# Altium PCB mbed_to_ccs.PcbDoc
Units mil, origin at the board's own origin, x right, y up, seen from the top; angles counter-clockwise.
Board outline 2290 x 2080 mil, 2 copper layers (Top Layer, Bottom Layer); 10 components, 14 nets, 86 pads, 5 vias.
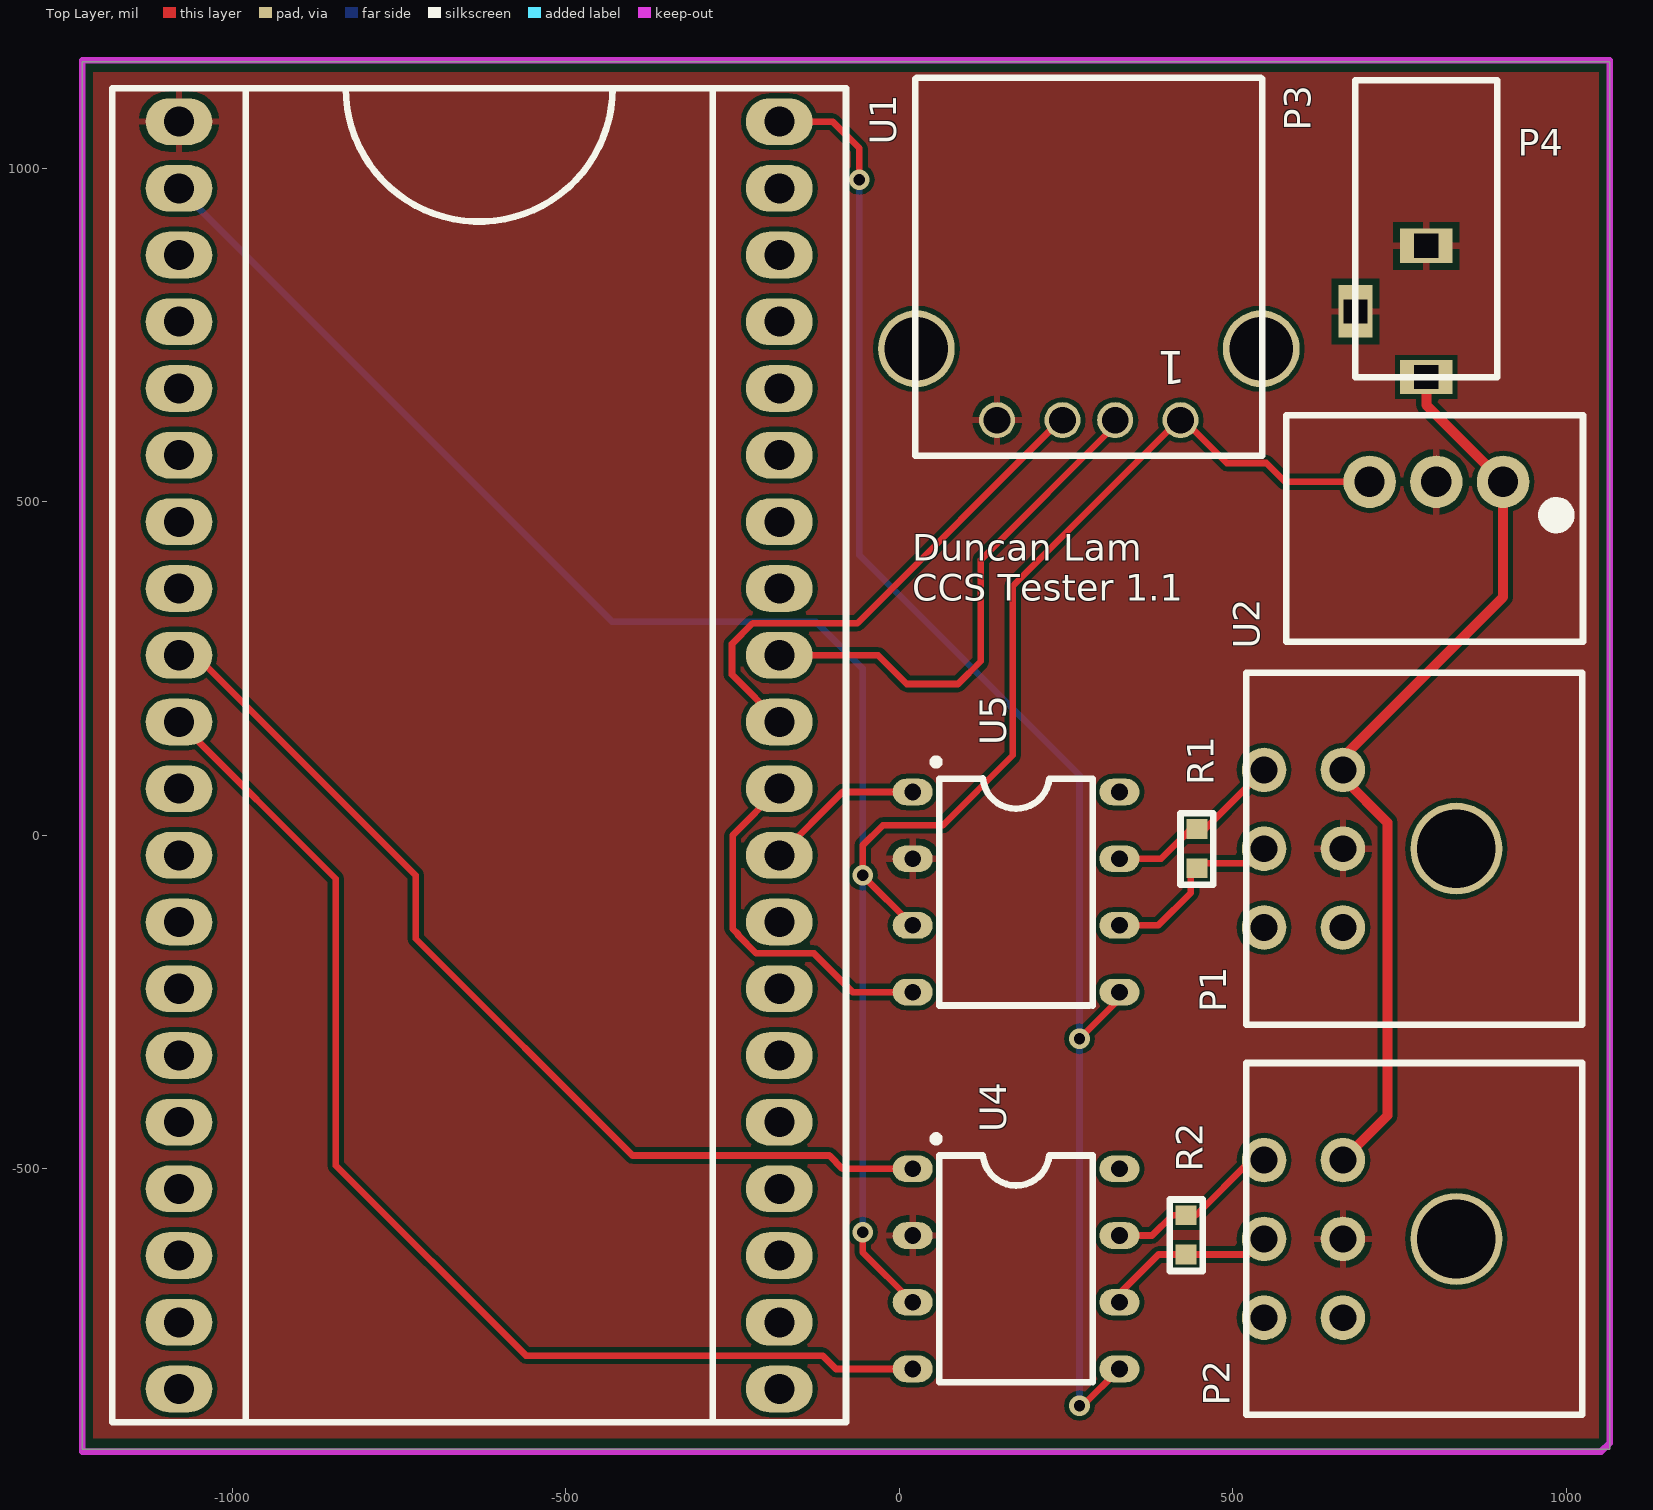
[diagram p0: Top Layer view]
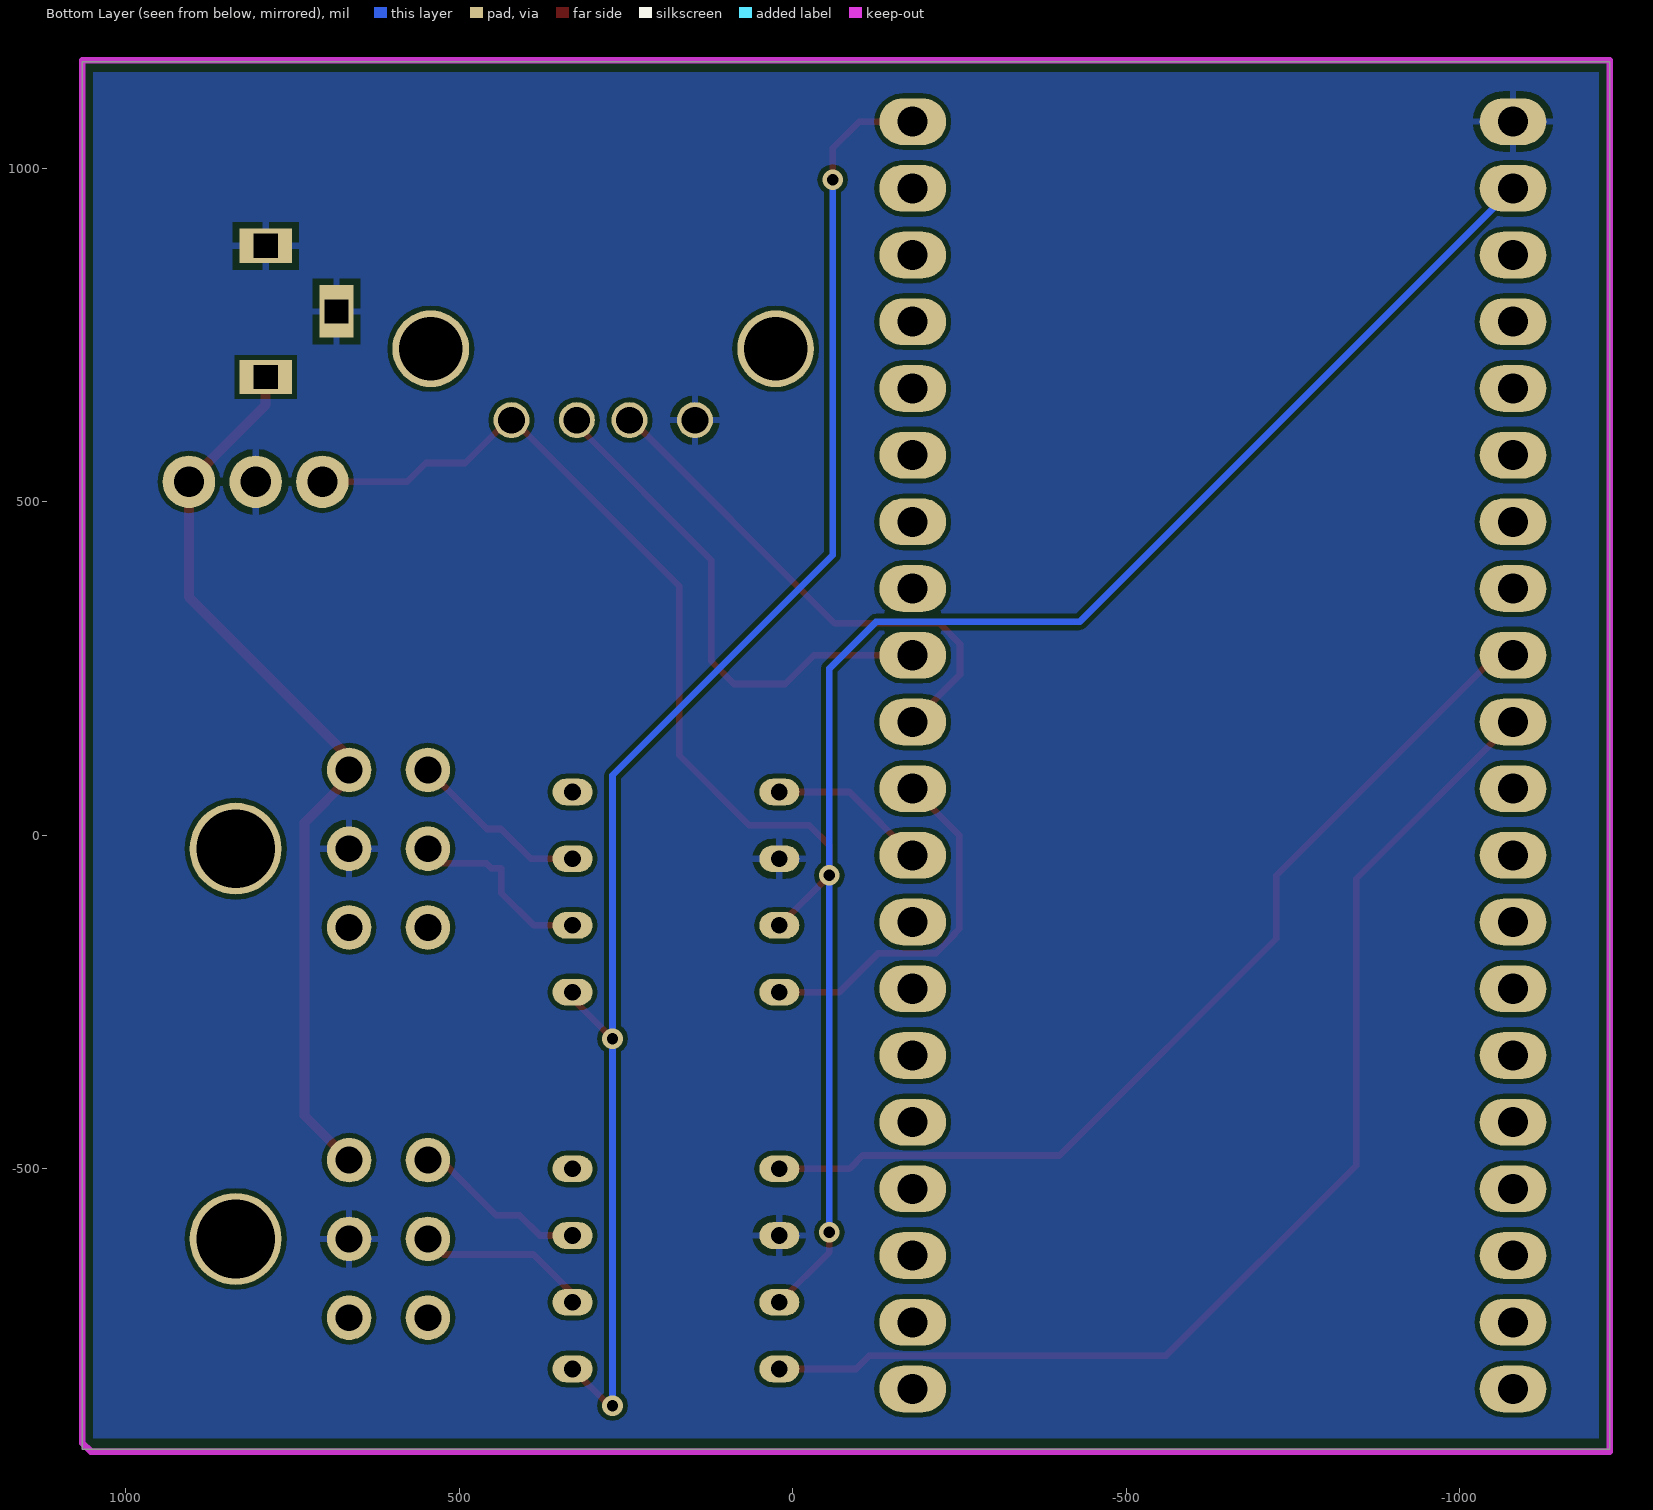
[diagram p1: Bottom Layer view, seen from below]

## Layer stack, top to bottom
Top Solder: solder mask 0.4, Solder Resist, Dk 3.5
Top Layer: signal copper 1.4
Dielectric 1: dielectric 12.6, FR-4, Dk 4.8
Bottom Layer: signal copper 1.4
Bottom Solder: solder mask 0.4, Solder Resist, Dk 3.5

## Board outline
-1225,1160 1065,1160 1065,-920 -1225,-920

## Design rules (kind name [scope] priority, off if disabled: settings)
BoardOutlineClearance [All] p1: gap=16
Clearance [All] p1: gap=7
DiffPairsRouting [All] p1: maxlimit=10 minlimit=10 mostfreqgap=10 toplayer_minwidth=7 toplayer_maxwidth=15 toplayer_prefwidth=10 bottomlayer_minwidth=7 bottomlayer_maxwidth=15 bottomlayer_prefwidth=10 maxuncoupledlength=500
HoleSize [All] p1: absolutevalues=TRUE maxlimit=28 minlimit=13 maxpercent=80.000 minpercent=20.000
MinimumAnnularRing [All] p1: minimumring=7
PolygonConnect [All] p1: connectstyle=Relief reliefconductorwidth=10 reliefentries=4 polygonreliefangle="90 Angle" airgapwidth=10
RoutingVias [All] p1: holewidth=14 width=27 viastyle="Through Hole" minholewidth=14 minwidth=28 maxholewidth=14 maxwidth=28
SolderMaskExpansion [All] p1: expansion=4
Width Width_1 [All] p1: maxlimit=15 minlimit=7 preferedwidth=10
Width 12V [InNet('12V')] p2: maxlimit=25 minlimit=15 preferedwidth=20
28 further rules are at their usual default settings.

## Classes and differential pairs
differential pair CAN1: +CAN1_P -CAN1_N
differential pair CAN2: +CAN2_P -CAN2_N
differential pair USB: +USB_P -USB_N

## Components (designator, comment, footprint, x,y, rotation, side; value= is the part's Value field where it differs from the comment)
P1 "CCS" PCB_MLX_MICROFIT_3X2 835,-20 r90 top
P2 "CCS" PCB_MLX_MICROFIT_3X2 835,-605 r90 top
P3 "USB-A" "USB-A UE27AC54100 Receptacle" 284,676 r180 top
P4 "PJ-007" "BARREL JACK PJ007" 790,687 r270 top
R1 "120" PCB_GENERIC_SMD_0603 446,-20 r270 top
R2 "120" PCB_GENERIC_SMD_0603 430,-599 r270 top
U1 "LPC1768 mbed" "LPC 1768 mbed Layout" -630,120 r0 top
U2 "R78E-1.0 DC/DC" R78-1.0 805,530 r180 top
U4 "MCP2562" MCP2562 175,-650 r0 top
U5 "MCP2562" MCP2562 175,-85 r0 top

## Footprints (in the part's own frame and the unit in brackets; to place one, negate y for a bottom-side part, rotate by r counter-clockwise, add the part's x,y. Pads: shape width x height; smd on the part's side, far side on the other; paste and mask are expansions set on the pad)
"BARREL JACK PJ007" [mm] "Pin connections for Barrel Jack"
  rect 1.3x2 hole 0.9 square: 1(0,0) 2(-5,0)
  rect 2x1.3 hole 0.9 square: 3(-2.5,-2.7)
  silkscreen extent -11.3,-2.7 0,2.7, body extent -11.31,-2.68 0.14,2.67, height 7.4
"LPC 1768 mbed Layout" [mil]
  oval 100x70 hole 45: 1(-450,950) 2(-450,850) 3(-450,750) 4(-450,650) 5(-450,550) 6(-450,450) 7(-450,350) 8(-450,250) 9(-450,150) 10(-450,50) 11(-450,-50) 12(-450,-150) 13(-450,-250) 14(-450,-350) 15(-450,-450) 16(-450,-550) 17(-450,-650) 18(-450,-750) 19(-450,-850) 20(-450,-950) 21(450,-950) 22(450,-850) 23(450,-750) 24(450,-650) 25(450,-550) 26(450,-450) 27(450,-350) 28(450,-250) 29(450,-150) 30(450,-50) 31(450,50) 32(450,150) 33(450,250) 34(450,350) 35(450,450) 36(450,550) 37(450,650) 38(450,750) 39(450,850) 40(450,950)
  silkscreen extent -550,-1000 550,1000, body extent -545,-990 545,1000, height 260
MCP2562 [mil]
  oval 60x40 hole 25: 1(-155,150) 2(-155,50) 3(-155,-50) 4(-155,-150) 5(155,-150) 6(155,-50) 7(155,50) 8(155,150)
  silkscreen extent -125,-170 115,200, body extent -115,-170 115,170, height 210
PCB_GENERIC_SMD_0603 [mm]
  rect 0.75x0.8 smd: 1(-0.75,0) 2(0.75,0)
  silkscreen extent -1.35,-0.63 1.38,0.63, body extent -0.75,-0.5 0.75,0.5, height 0.45
PCB_MLX_MICROFIT_3X2 [mm]
  round 1.7 hole 1.02: 1(3,4.32) 2(0,4.32) 3(-3,4.32) 4(3,7.32) 5(0,7.32) 6(-3,7.32)
  round 3.5 hole 3: ""(0,0)
  silkscreen extent -6.7,-4.8 6.7,8, body extent -6.57,-4.65 6.58,7.59, height 8.83
R78-1.0 [mm]
  round 2 hole 1.15: 1(-2.54,0) 2(0,0) 3(2.54,0)
  silkscreen extent -5.59,-2.54 5.71,6.1, body extent -4.44,-1.59 4.45,5.4, height 10.4
"USB-A UE27AC54100 Receptacle" [mil]
  round 54 hole 40: 1(-137.5,53.5) 2(-39.5,53.5) 3(39.5,53.5) 4(137.5,53.5)
  round 115 hole 95: NC(-258.5,-53.5) NC(258.5,-53.5)
  silkscreen extent -260,-460 260,107, body extent -272,-455 272,106, height 247

## Part data
P1 P2: library part SCH_MLX_MICROFIT_3X2
P3: library part "USB-A UE27AC54100 Receptacle"
P4: library part Component_1
R1 R2: library part SCH_GENERIC_RESISTOR_0603, "120 Ohms"
U2: library part R78E-1.0

## Via types
v1: diameter 31, hole 17, Top Layer to Bottom Layer, 5 vias

## Nets (pads, with @x,y where several pads share a name; then routed paths per layer and width w, separated by ;. In a path a pad name is that pad's centre, name@x,y a point inside that pad or via, vN(x,y) a via of type N, cw(c..) or ccw(c..) an arc to the next point about the centre after c; other vN are vias at no path point)
3.3V: U1.40 U4.5 U5.5 | length 2335.9
  Top Layer w10: U1.40 -100,1070 -60,1030 v1(-60,983) ; v1(270,-855) 275,-855 U4.5 ; v1(270,-305) 330,-245 U5.5
  Bottom Layer w10: v1(-60,983) -60,420 270,90 v1(270,-305) v1(270,-855)
5V: P3.1 U1.2 U2.3 U4.3 U5.3 | length 3669.8
  Top Layer w10: v1(-55,-595) -55,-625 U4.3 ; U5.3 v1(-55,-60) -55,-15 -25,15 65,15 170,120 170,374 422.5,626.5 490.91,558.09 549.97,558.09 578.06,530 U2.3
  Bottom Layer w10: U1.2 -430,320 -125,320 -55,250 v1(-55,-60) v1(-55,-595)
12V: P1.1 P2.1 P4.1 U2.1 | length 1376.5
  Top Layer w15: P2.1 732,-419.81 732,19 664.92,86.08 P1.1 664.92,116.92 905,357 U2.1 790,645 P4.1
CAN1_N: P1.5 R1.2 U5.6 | length 285.8
  Top Layer w10: U5.6 388,-135 437,-86 437,-49.53 451.47,-49.53 459,-42 524.81,-42 P1.5
CAN1_P: P1.4 R1.1 U5.7 | length 286.1
  Top Layer w10: U5.7 392.47,-35 437,9.53 458.23,9.53 P1.4
  Top Layer w15: U5.7 U5.7@340,-45
CAN2_N: P2.5 R2.2 U4.6 | length 263.8
  Top Layer w10: U4.6 330,-687 388.47,-628.53 R2.2 523.28,-628.53 P2.5
CAN2_P: P2.4 R2.1 U4.7 | length 263.7
  Top Layer w10: U4.7 378.72,-600 409.25,-569.47 R2.1 444.53,-569.47 527.11,-486.89 P2.4
GND: P1.2 P2.2 P3.4 P4.2 P4.3 U1.1 U2.2 U4.2 U5.2 | length 10
  Top Layer w10: U5.2 U5.2@30,-35
NetU1_9: U1.9 U4.1 | length 1449.6
  Top Layer w10: U1.9@-1055,270 -725,-60 -725,-155 -400,-480 -105,-480 -85,-500 U4.1
NetU1_10: U1.10 U4.4 | length 1753.7
  Top Layer w10: U1.10 -845,-65 -845,-495 -560,-780 -115,-780 -95,-800 U4.4
NetU1_29: U1.29 U5.1 | length 239.4
  Top Layer w10: U1.29 -85,65 U5.1
NetU1_30: U1.30 U5.4 | length 549.2
  Top Layer w10: U1.30 -250,0 -250,-140 -242,-148 -242,-149.47 -214.47,-177 -128,-177 -70,-235 U5.4
USB_N: P3.2 U1.32 | length 783.3
  Top Layer w10: U1.32 -32,270 11,227 88,227 122,261 122,413 324.5,615.5 P3.2@324.5,626.5
USB_P: P3.3 U1.31 | length 783.5
  Top Layer w10: U1.31 -251,241 -251,287 -220,318 -63,318 P3.3@245.5,626.5
pads on no net: P1. P1.3 P1.6 P2. P2.3 P2.6 P3.NC U1.3 U1.4 U1.5 U1.6 U1.7 U1.8 U1.11 U1.12 U1.13 U1.14 U1.15 U1.16 U1.17 U1.18 U1.19 U1.20 U1.21 U1.22 U1.23 U1.24 U1.25 U1.26 U1.27 U1.28 U1.33 U1.34 U1.35 U1.36 U1.37 U1.38 U1.39 U4.8 U5.8

## Polygon pours and split planes (outlines as drawn)
GND on Top Layer "GND_top" (solid, remove dead copper, pour order 0): -1225.64,1160 -1218.64,1153 -1218.64,-907.74 1050,-908.11 1050,1160
GND on Bottom Layer "GND_bot" (solid, remove dead copper, pour order 2): -1208,1145 -1206,1147 1050,1147 1050,-904 1049,-905 -1210,-905 -1210,1144 -1208,1146

## Keep-outs
Keep-Out Layer:
  lines w10: -1225,-924 -1225,1162 1065,1162 1065,-911 1052,-924 -1225,-924

## Silkscreen, mask and mechanical layers (free items; w line width, h text height)
Top Overlay:
  text "Duncan Lam / CCS Tester 1.1" at 19,352 h40

## Text inside footprints (layer, text, board x,y; h text height)
P3: Top Overlay "1" at 429,726 h50 r180